# EAGLE board (Eagle)DriveUnit_B-series(ver2.0) (EAGLE 9.6.2)
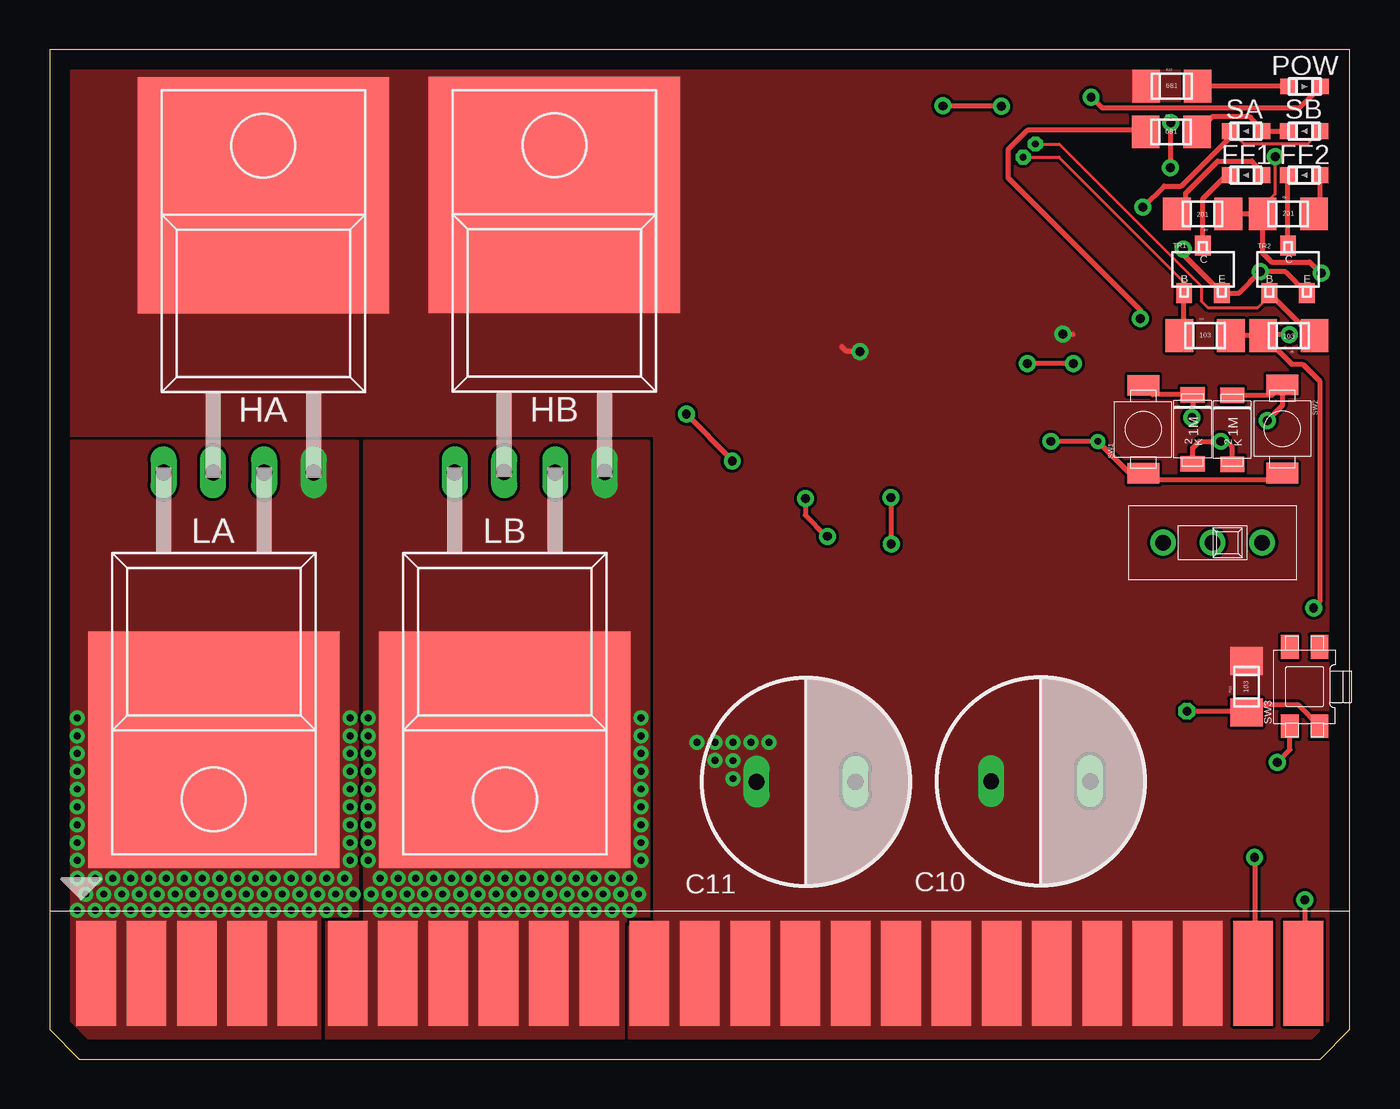
[diagram p0: board, top side]
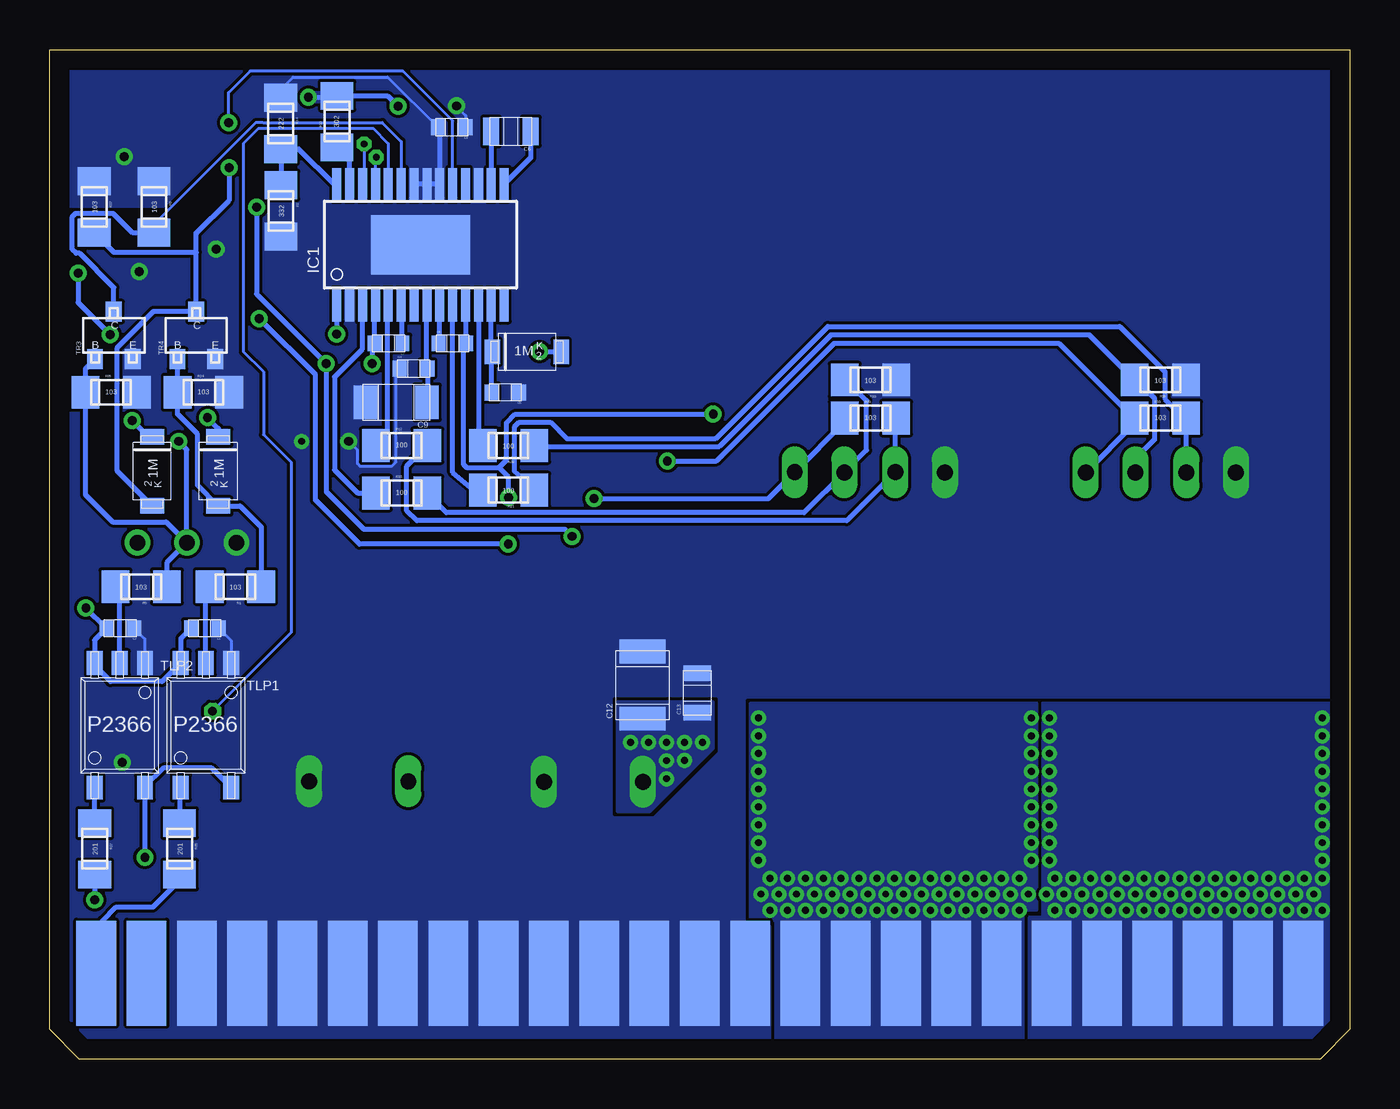
[diagram p1: board, bottom side, seen from below]

Size 65.68 x 51 mm. Coordinates in mm from the lower left corner, seen from the top.
Outline: 0,51 0,1.5 1.5,0 64.18,0 65.68,1.5 65.68,51 0,51
Copper layers (1*16): Top 0.035mm / dielectric 1.5mm / Bottom 0.035mm
Design rules "default": minimum track width 6mil, minimum drill 0.35mm, track to track 6mil, track to pad 6mil, pad to pad 6mil, via to via 6mil, smd to smd 6mil, copper to edge 40mil, drill to drill 6mil, minimum pad ring 10mil, minimum via ring 8mil, stop-mask expansion 4mil, vias tented up to drill 0mil, thermal gap 10mil

## Footprints (pad centres in the part's own frame; a part is rotated, then mirrored left to right if it is on the bottom)
GCM188L81H104KA57 = smd 0.7 x 0.8: P$1 -0.7,0; P$2 0.7,0
GCM21BR71H474KA55 = smd 0.8 x 1.4: P$1 -1,0; P$2 1,0
GRT31CC81H225KE01L = smd 1.2 x 1.7: P$1 -1.55,0; P$2 1.55,0
35PZJ330M10X9 = drill 0.8 long: A 0,2.5; C 0,-2.5
GRM32ER7YA106KA12 = smd 1.2 x 2.3: P$1 -1.7,0; P$2 1.7,0
GRM21BC72A105KE01 = smd 0.8 x 1.4: P$1 -1,0; P$2 1,0
GS1010FL = smd 0.78 x 1.22: A 3.48,0; C 0,0
10046971-019LF = smd 2 x 5.3: P$1 -30.48,0; P$2 -27.94,0; P$3 -25.4,0; P$4 -22.86,0; P$5 -20.32,0; P$6 -17.78,0; P$7 -15.24,0; P$8 -12.7,0; P$9 -10.16,0; P$10 -7.62,0; P$11 -5.08,0; P$12 -2.54,0; P$13 0,0; P$14 2.54,0; P$15 5.08,0; P$16 7.62,0; P$17 10.16,0; P$18 12.7,0; P$19 15.24,0; P$20 17.78,0; P$21 20.32,0; P$22 22.86,0; P$23 25.4,0; P$24 27.94,0; P$25 30.48,0 | smd 2 x 5.3 bottom: P$26 30.48,0; P$27 27.94,0; P$28 25.4,0; P$29 22.86,0; P$30 20.32,0; P$31 17.78,0; P$32 15.24,0; P$33 12.7,0; P$34 10.16,0; P$35 7.62,0; P$36 5.08,0; P$37 2.54,0; P$38 0,0; P$39 -2.54,0; P$40 -5.08,0; P$41 -7.62,0; P$42 -10.16,0; P$43 -12.7,0; P$44 -15.24,0; P$45 -17.78,0; P$46 -20.32,0; P$47 -22.86,0; P$48 -25.4,0; P$49 -27.94,0; P$50 -30.48,0
TO-220AB-NOHOLE = smd 12.7 x 11.938: DRAIN 0,8.915 | drill 0.8 long: GATE -2.54,-5.08; SOURCE 2.54,-5.08
A3921 = smd 0.45 x 1.65: 1 0,-0.9; 2 0.65,-0.9; 3 1.3,-0.9; 4 1.95,-0.9; 5 2.6,-0.9; 6 3.25,-0.9; 7 3.9,-0.9; 8 4.55,-0.9; 9 5.2,-0.9; 10 5.85,-0.9; 11 6.5,-0.9; 12 7.15,-0.9; 13 7.8,-0.9; 14 8.45,-0.9; 15 8.45,5.2; 16 7.8,5.2; 17 7.15,5.2; 18 6.5,5.2; 19 5.85,5.2; 20 5.2,5.2; 21 4.55,5.2; 22 3.9,5.2; 23 3.25,5.2; 24 2.6,5.2; 25 1.95,5.2; 26 1.3,5.2; 27 0.65,5.2; 28 0,5.2 | smd 5 x 3: PAD 4.225,2.15
SML-E12V8WT86 = smd 0.8 x 0.8: A 0,1.65; K 0,0
RG2012 = smd 1.4 x 1.65: LEFT 0,0; RIGHT 2.6,0
TVAF06-A020B-R = smd 1.05 x 1.6: LEFT 0,0; RIGHT 4.45,0
THAF01-NC-R = smd 1.2 x 0.9: 1 0,1.5; 2 4,1.5; 3 0,0; 4 4,0
SS-12D00G3 = drill 0.8: C 0,0; L -2.5,0; R 2.5,0
TLP2366 = smd 0.8 x 1.2: 1 0,0; 3 2.54,0; 4 2.54,6.3; 5 1.27,6.3; 6 0,6.3
2SC3325 = smd 1 x 0.8: B 0,1.9; C 2.4,0.95; E 0,0

## Placement (x,y rotation side)
C1  GCM188L81H104KA57  [GCM188L81H104KA57]  57.84,21.77 180 bottom
C2  GCM188L81H104KA57  [GCM188L81H104KA57]  62.1,21.77 180 bottom
C3  GCM188L81H104KA57  [GCM188L81H104KA57]  45.36,47.07 180 bottom
C4  GCM188L81H104KA57  [GCM188L81H104KA57]  47.29,34.89 0 bottom
C5  GCM188L81H104KA57  [GCM188L81H104KA57]  42.66,33.68 180 bottom
C6  GCM21BR71H474KA55  [GCM21BR71H474KA55]  42.38,46.86 180 bottom
C7  GCM188L81H104KA57  [GCM188L81H104KA57]  48.56,36.16 180 bottom
C8  GCM188L81H104KA57  [GCM188L81H104KA57]  45.33,36.16 0 bottom
C9  GRT31CC81H225KE01L  [GRT31CC81H225KE01L]  48.17,33.18 180 bottom
C10  35PZJ330M10X9  [35PZJ330M10X9]  50.06,14.04 90 top
C11  35PZJ330M10X9  [35PZJ330M10X9]  38.21,14.01 90 top
C12  GRM32ER7YA106KA12  [GRM32ER7YA106KA12]  35.73,18.9 90 bottom
C13  GRM21BC72A105KE01  [GRM21BC72A105KE01]  32.97,18.5 90 bottom
D1  GS1010FL  [GS1010FL]  43.32,35.73 0 bottom
D2  GS1010FL  [GS1010FL]  57.16,31.43 270 bottom
D3  GS1010FL  [GS1010FL]  60.5,31.43 270 bottom
D4  GS1010FL  [GS1010FL]  57.73,33.56 270 top
D5  GS1010FL  [GS1010FL]  59.73,33.54 270 top
EDGE1  10046971-019LF  [10046971-019LF]  32.84,4.35 0 top
HA  IRLB3813NOHOLE  [TO-220AB-NOHOLE]  10.8,34.72 0 top
HB  IRLB3813NOHOLE  [TO-220AB-NOHOLE]  25.5,34.73 0 top
IC1  A3921  [A3921]  51.17,38.99 0 bottom
LA  IRLB3813NOHOLE  [TO-220AB-NOHOLE]  8.3,24.56 180 top
LB  IRLB3813NOHOLE  [TO-220AB-NOHOLE]  23,24.56 180 top
LED1  SML-E12V8WT86  [SML-E12V8WT86]  59.6,46.87 270 top
LED2  SML-E12V8WT86  [SML-E12V8WT86]  62.54,46.87 270 top
LED3  SML-E12V8WT86  [SML-E12V8WT86]  64.22,49.13 90 top
LED4  SML-E12V8WT86  [SML-E12V8WT86]  59.6,44.65 270 top
LED5  SML-E12V8WT86  [SML-E12V8WT86]  62.54,44.65 270 top
R1  RG2012  [RG2012]  54.99,23.87 180 bottom
R2  RG2012N-332-W-T1  [RG2012]  53.99,44.15 270 bottom
R3  RG2012P-681-B-T5  [RG2012]  55.35,46.84 0 top
R4  RG2012  [RG2012]  57.06,36.55 0 top
R5  RG2012  [RG2012]  63.89,36.55 180 top
R6  RG2012  [RG2012]  60.41,44.35 270 bottom
R7  RG2012N-201-W-T1  [RG2012]  59.54,42.7 180 top
R8  RG2012N-201-W-T1  [RG2012]  61.26,42.7 0 top
R9  RG2012  [RG2012]  59.75,23.87 180 bottom
R10  RG2012Q-100-D-T5  [RG2012]  49.2,28.6 0 bottom
R11  RG2012  [RG2012]  60.45,17.52 90 top
R12  RG2012Q-100-D-T5  [RG2012]  49.2,31 0 bottom
R13  RG2012P-302-B-T5  [RG2012]  51.16,46.06 90 bottom
R14  RG2012N-222-W-T1  [RG2012]  54.01,48.57 270 bottom
R15  RG2012  [RG2012]  8.28,34.31 180 bottom
R16  RG2012  [RG2012]  10.88,32.38 0 bottom
R17  RG2012  [RG2012]  63.42,44.35 270 bottom
R18  RG2012  [RG2012]  22.92,34.31 180 bottom
R19  RG2012  [RG2012]  25.52,32.38 0 bottom
R20  RG2012Q-100-D-T5  [RG2012]  41.2,31 180 bottom
R21  RG2012Q-100-D-T5  [RG2012]  41.2,28.75 180 bottom
R22  RG2012P-681-B-T5  [RG2012]  55.38,49.15 0 top
R24  RG2012  [RG2012]  59.21,33.68 0 bottom
R25  RG2012  [RG2012]  63.87,33.68 0 bottom
R26  RG2012N-201-W-T1  [RG2012]  59.11,11.93 270 bottom
R27  RG2012N-201-W-T1  [RG2012]  63.4,11.93 270 bottom
SW1  TVAF06-A020B-R  [TVAF06-A020B-R]  55.24,29.59 90 top
SW2  TVAF06-A020B-R  [TVAF06-A020B-R]  62.26,34.06 270 top
SW3  THAF01-NC-R  [THAF01-NC-R]  64.14,16.82 90 top
SW4  SS-12D00G3  [SS-12D00G3]  58.74,26.09 180 top
TLP1  TLP2366  [TLP2366]  59.05,13.72 0 bottom
TLP2  TLP2366  [TLP2366]  63.4,13.72 0 bottom
TR1  2SC3325  [2SC3325]  59.2,38.7 90 top
TR2  2SC3325  [2SC3325]  63.5,38.7 90 top
TR3  2SC3325  [2SC3325]  61.48,35.36 90 bottom
TR4  2SC3325  [2SC3325]  57.32,35.36 90 bottom

## Library data of the parts
C1-C5 C7 C8 = GCM188L81H104K57(0.1uF)
C6 = GCM21BR71H474KA55(0.47uF)
C9 = GRT31CC81H225KE01L
C10 C11 = 35PZJ330M10X9
C12 = GRM32ER7YA106KA12(10uF)
C13 = GRM21BC72A105KE01(1uF)
D1-D5 = GS1010FL
EDGE1 = 10046971-019LF
HA HB LA LB = OKUDA_libraries
IC1 = A3921
LED1-LED5 = SML-E12V8WT86
R1 R4-R6 R9 R11 R15-R19 R24 R25 = RG2012
R2 = RG2012N-332-W-T1
R3 R22 = RG2012P-681-B-T5
R7 R8 R26 R27 = RG2012N-201-W-T1
R10 R12 R20 R21 = RG2012Q-100-D-T5
R13 = RG2012P-302-B-T5
R14 = RG2012N-222-W-T1
SW1 SW2 = TVAF06-A020B-R
SW3 = THAF01-NC-R
SW4 = SS-12D00G3
TLP1 TLP2 = TLP2366
TR1-TR4 = 2SC3325

## Nets
DIR: D3.A IC1.19 R17.RIGHT TR4.C
DIR_IN: EDGE1.P$26 R26.RIGHT
FF1: IC1.25 R4.LEFT TR1.B
FF2: IC1.26 R5.LEFT TR2.B
GHA: IC1.10 R21.RIGHT
GHB: IC1.5 R12.LEFT
GLA: IC1.12 R20.RIGHT
GLB: IC1.3 R10.LEFT
GND: C1.P$1 C2.P$1 C3.P$1 C4.P$1 C5.P$1 C9.P$2 C10.C C11.C C12.P$2 C13.P$2 EDGE1.P$28 EDGE1.P$29 EDGE1.P$30 EDGE1.P$31 EDGE1.P$32 EDGE1.P$33 EDGE1.P$34 EDGE1.P$35 EDGE1.P$36 EDGE1.P$37 EDGE1.P$38 EDGE1.P$39 IC1.2 IC1.17 IC1.PAD LA.SOURCE LB.SOURCE LED3.K R2.RIGHT R13.RIGHT R15.LEFT R18.LEFT R24.RIGHT R25.RIGHT SW1.LEFT SW2.RIGHT SW3.1 SW4.R TLP1.4 TLP2.4 TR1.E TR2.E TR3.E TR4.E
GND_IN: EDGE1.P$24 TLP1.3 TLP2.3
LAP: D4.A D5.A R9.LEFT R25.LEFT SW4.C TR3.B
N$1: C6.P$1 IC1.15
N$2: C6.P$2 IC1.16
N$3: C7.P$1 IC1.6
N$4: IC1.28 R2.LEFT R14.RIGHT
N$5: LED4.K TR1.C
N$6: C4.P$2 C9.P$1 IC1.8
N$7: C5.P$2 D1.C IC1.13
N$8: LED5.K TR2.C
N$9: LED4.A R7.RIGHT
N$10: LED5.A R8.RIGHT
N$11: R1.RIGHT TLP1.5
N$12: D2.C D4.C SW1.RIGHT
N$13: HA.GATE R16.RIGHT R21.LEFT
N$14: R9.RIGHT TLP2.5
N$15: C8.P$1 IC1.9
N$16: D2.A R1.LEFT R24.LEFT TR4.B
N$18: LED1.A LED2.K R3.RIGHT
N$19: IC1.27 R13.LEFT
N$20: D3.C D5.C SW2.LEFT
N$21: HB.GATE R12.RIGHT R19.RIGHT
N$22: LED3.A R22.RIGHT
N$23: R26.LEFT TLP1.1
N$24: R27.LEFT TLP2.1
N$25: LA.GATE R15.RIGHT R20.LEFT
N$26: LB.GATE R10.RIGHT R18.RIGHT
PWM: IC1.23 R6.RIGHT TR3.C
PWM_IN: EDGE1.P$25 R27.RIGHT
RESET: IC1.24 R11.LEFT SW3.3
SA: C8.P$2 EDGE1.P$1 EDGE1.P$2 EDGE1.P$3 EDGE1.P$4 EDGE1.P$5 EDGE1.P$45 EDGE1.P$46 EDGE1.P$47 EDGE1.P$48 EDGE1.P$49 EDGE1.P$50 HA.SOURCE IC1.11 LA.DRAIN R3.LEFT R16.LEFT
SB: C7.P$2 EDGE1.P$6 EDGE1.P$7 EDGE1.P$8 EDGE1.P$9 EDGE1.P$10 EDGE1.P$11 EDGE1.P$40 EDGE1.P$41 EDGE1.P$42 EDGE1.P$43 EDGE1.P$44 HB.SOURCE IC1.4 LB.DRAIN LED1.K LED2.A R19.LEFT
V5: C1.P$2 C2.P$2 C3.P$2 IC1.20 IC1.21 IC1.22 R4.RIGHT R5.RIGHT R6.LEFT R7.LEFT R8.LEFT R14.LEFT R17.LEFT TLP1.6 TLP2.6
VCC: C10.A C11.A C12.P$1 C13.P$1 D1.A EDGE1.P$12 EDGE1.P$13 EDGE1.P$14 EDGE1.P$15 EDGE1.P$16 EDGE1.P$17 EDGE1.P$18 EDGE1.P$19 EDGE1.P$20 EDGE1.P$21 EDGE1.P$22 EDGE1.P$23 HA.DRAIN HB.DRAIN IC1.1 R11.RIGHT R22.LEFT
VCC_IN: EDGE1.P$27

## Tracks (layer width: path | path; a pad name or v marks a point on that pad's centre or on a via)
DIR  (via drill 0.45)
  Top 0.152: v56.64,47.31 56.61,47.28
  Top 0.254: 56.61,47.28 v56.61,45.02
  Bottom 0.152: IC1.19 45.32,47.4 47.83,49.91 55.55,49.91 56.64,48.82 v56.64,47.31
  Bottom 0.254: v56.61,45.02 v56.62,45.02 56.62,43.38 58.29,41.7 58.27,41.68 58.27,40.76 | 58.27,40.76 TR4.C 58.29,37.78 60.42,37.78 62.25,35.95 62.25,29.7 D3.A | R17.RIGHT 62.43,40.76 58.27,40.76
DIR_IN
  Bottom 0.152: 63.32,6.56 EDGE1.P$26 63,4.67
  Bottom 0.254: 63,4.67 63,7 62.31,7.69 60.45,7.69 59.11,9.03 R26.RIGHT
FF1  (via drill 0.35)
  Top 0.152: v49.17,45.57 50.98,45.57 57.3,39.25 TR1.B
  Top 0.254: R4.LEFT 57.3,36.79 TR1.B
  Bottom 0.152: IC1.25 49.22,45.52 v49.17,45.57
FF2  (via drill 0.35)
  Top 0.152: v49.79,46.23 51,46.23 58.17,39.06 58.17,38.3 58.5,37.97 61.02,37.97 61.74,38.7 TR2.B
  Top 0.254: TR2.B 63.75,36.55 R5.LEFT
  Bottom 0.152: IC1.26 49.78,44.28 v49.78,46.22 v49.79,46.23
GHA
  Bottom 0.254: R21.RIGHT 44.27,28.75 45.32,29.64 IC1.10
GHB
  Bottom 0.152: 48.62,38.04 IC1.5 48.62,38.04 | R12.LEFT 49.2,31.03 48.62,31.6
  Bottom 0.254: 48.62,38.04 48.62,31.6
GLA
  Bottom 0.152: 44,30.84 R20.RIGHT
  Bottom 0.254: IC1.12 44,38.07 44,30.84
GLB
  Bottom 0.254: IC1.3 49.9,38.06 49.9,35.85 51.29,34.46 51.29,29.77 50.12,28.6 R10.LEFT
GND  (via drill 0.35, 0.45)
  Top 0.152: 45.15,48.13 v45.13,48.15
  Top 0.254: SW3.1 62.64,15.64 v62,15 | LED3.K 63.13,48.04 53.16,48.04 v52.6,48.6 | v48.08,48.13 45.15,48.13 | v50.57,31.21 v52.95,31.21 54.57,29.59 SW1.LEFT 55.48,29.59 55.79,29.28 61.93,29.28 SW2.RIGHT | v57.26,40.92 57.26,40.64 TR1.E 60.08,38.7 v61.15,39.77 | v61.15,39.77 v61.15,39.78 | v61.15,39.77 62.43,39.77 TR2.E
  Bottom 0.152: C1.P$1 56.51,21.14 TLP1.4 | C2.P$1 60.86,21.23 TLP2.4 | 51.94,48.6 51.88,48.66 R13.RIGHT | v45.13,48.15 45.13,48.13 44.66,47.66 C3.P$1 | C4.P$1 48.21,34.67 48.21,30.14 48.41,29.95 49.99,29.95 50.13,30.08 50.13,30.77 v50.56,31.21 v50.57,31.21 | v52.95,31.21 52.7,31.21
  Bottom 0.254: v52.6,48.6 51.94,48.6 | R13.RIGHT 48.61,48.66 v48.08,48.13 | TR3.E 61.41,35.43
  pour Bottom (rank 2, no thermals): -7.3,55 -7.3,-2 69,-2 69,55
GND_IN  (via drill 0.45)
  Top 0.152: 60.86,4.43 EDGE1.P$24
  Top 0.254: v60.86,10.19 60.86,4.43
  Bottom 0.152: 60.86,13.77 TLP2.3
  Bottom 0.254: TLP1.3 57.5,14.71 59.92,14.71 60.86,13.77 | TLP2.3 v60.86,10.19
LAP  (via drill 0.45)
  Top 0.254: 59.71,30.08 D5.A 59.73,30.91 59.43,31.21 v59.16,31.21 58.07,31.21 57.73,30.87 D4.A 57.73,30.24
  Bottom 0.254: SW4.C 59.75,25.08 R9.LEFT | TR3.B 63.87,34.87 R25.LEFT 63.87,28.51 62.5,27.14 59.79,27.14 SW4.C | SW4.C 58.74,30.79 v59.16,31.21
N$1
  Bottom 0.254: C6.P$1 41.38,45.53 IC1.15
N$2
  Bottom 0.152: IC1.16
  Bottom 0.254: C6.P$2 IC1.16
N$3
  Bottom 0.152: 47.86,38.03 IC1.6
  Bottom 0.254: C7.P$1 47.86,38.03
N$4
  Bottom 0.152: IC1.28 51.31,44.19 | 53.99,45.95 R14.RIGHT
  Bottom 0.254: 51.31,44.19 53.09,45.97 R14.RIGHT | 53.99,45.95 R2.LEFT
N$5
  Top 0.152: 59.56,44.52 59.63,44.59 LED4.K
  Top 0.254: TR1.C 58.25,43.46 59.38,44.59 59.63,44.59
N$6
  Bottom 0.152: C9.P$1 46.65,33.21
  Bottom 0.254: C9.P$1 46.59,33.21 C4.P$2 46.67,34.97 46.67,38.04 IC1.8
N$7
  Bottom 0.152: 43.37,35.78 D1.C 43.36,35.69
  Bottom 0.254: 43.37,35.78 IC1.13 | C5.P$2 43.36,35.69
N$8
  Top 0.254: TR2.C LED5.K
N$9
  Top 0.152: R7.RIGHT 57,42.77 57,43.43 | 61.34,44.82 61.34,44.75 LED4.A
  Top 0.254: R7.RIGHT 57.38,43.14 57.38,43.75 58.99,45.36 60.73,45.36 61.34,44.75
N$10
  Top 0.254: R8.RIGHT 64.19,43.03 LED5.A
N$11
  Bottom 0.254: R1.RIGHT 57.81,23.65 57.81,20.05 TLP1.5
N$12  (via drill 0.45)
  Top 0.254: SW1.RIGHT 55.72,33.56 57.6,33.56 D4.C 57.74,32.45 v57.7,32.41
  Bottom 0.254: D2.C 57.16,31.86 v57.7,32.41
N$13
  Bottom 0.152: 8.37,32.38 R16.RIGHT 8.26,32.36
  Bottom 0.254: R21.LEFT 41.83,29.38 42.18,29.68 42.18,31.96 41.97,32.17 40.38,32.17 39.57,31.36 32.03,31.36 26.38,37.02 11.63,37.02 9.34,34.72 9.34,33.35 8.37,32.38 | HA.GATE 8.26,32.36
N$14
  Bottom 0.152: 62.13,23.64 R9.RIGHT
  Bottom 0.254: TLP2.5 62.13,23.64
N$15
  Bottom 0.152: C8.P$1 45.97,36.22
  Bottom 0.254: 45.97,36.22 IC1.9
N$16
  Bottom 0.254: R1.LEFT 54.99,26.88 56.06,27.95 D2.A 58.2,28.99 58.2,31.57 59.21,32.58 R24.LEFT TR4.B
N$18
  Top 0.152: 61.34,46.9 LED1.A
  Top 0.254: LED2.K LED1.A 60.59,47.62 58.75,47.62 57.97,46.84 R3.RIGHT
N$19
  Bottom 0.152: IC1.27
  Bottom 0.254: IC1.27 50.52,45.42 R13.LEFT
N$20  (via drill 0.45)
  Top 0.152: SW2.LEFT 62.26,34.43
  Top 0.254: SW2.LEFT 62.31,34.01 | SW2.LEFT 62.1,33.9 | SW2.LEFT 62.26,33.01 v61.5,32.25 | D5.C 61.74,33.54 SW2.LEFT
  Bottom 0.254: v61.5,32.25 | 60.85,31.43 D3.C 60.68,31.43 v61.5,32.25
N$21
  Bottom 0.152: 22.96,32.34 R19.RIGHT
  Bottom 0.254: R12.RIGHT 47.64,29.96 47.64,27.7 47.14,27.2 25.41,27.2 HB.GATE 22.96,32.34
N$22
  Top 0.152: LED3.A 62.55,49.15
  Top 0.254: 62.55,49.15 R22.RIGHT
N$23
  Bottom 0.152: TLP1.1 59.11,13.66
  Bottom 0.254: 59.11,13.66 R26.LEFT
N$24
  Bottom 0.254: R27.LEFT TLP2.1
N$25
  Bottom 0.254: R20.LEFT 41.15,30.95 31.85,30.95 26.22,36.58 13.15,36.58 R15.RIGHT 10.8,34.31 9.88,33.39 9.88,31.29 10.84,30.33 LA.GATE
N$26
  Bottom 0.152: 25.31,34.31 R18.RIGHT
  Bottom 0.254: R10.RIGHT 46.6,28.58 45.63,27.61 27.57,27.61 LB.GATE 24.41,30.77 24.41,33.28 25,33.87 25,34 25.31,34.31
PWM
  Bottom 0.152: IC1.23 47.92,46.35 48.88,47.31 54.9,47.31 54.91,47.3 55.27,47.3 60.41,42.16 R6.RIGHT
  Bottom 0.254: TR3.C 62.43,38.98 64.16,40.71 64.34,40.71 64.53,40.9 64.53,42.56 64.36,42.73 62.48,42.73 61.5,41.75 R6.RIGHT
PWM_IN  (via drill 0.45)
  Top 0.152: 63.39,4.42 EDGE1.P$25
  Top 0.254: v63.39,8.05 63.39,4.42
  Bottom 0.152: R27.RIGHT
  Bottom 0.254: R27.RIGHT v63.39,8.05
RESET  (via drill 0.45)
  Top 0.152: 60.39,17.58 R11.LEFT 60.45,17.57
  Top 0.254: v57.45,17.58 60.39,17.58 | 60.45,17.57 60.8,17.92 63.04,17.92 SW3.3
  Bottom 0.152: IC1.24 48.57,46.24 49.32,47 55.14,47 55.89,46.25 55.89,35.74 54.87,34.72 54.87,31.55 53.46,30.14 53.46,21.57 v57.45,17.58
SA  (via drill 0.35, 0.45)
  Top 0.152: v42.5,26.03 v42.51,26.02
  Top 0.254: v34.48,30.22 34.48,30.26 v32.16,32.58 | v42.5,28.37 v42.5,26.03 | v55.09,37.41 55.09,37.84 48.43,44.51 48.43,45.96 49.38,46.92 55.27,46.92 R3.LEFT
  Bottom 0.152: 44.63,38.05 IC1.11 | C8.P$2 | v32.16,32.58 | 42.95,29.89 42.96,29.9 42.98,29.89 | v55.09,37.41 | 10.88,32.1 R16.LEFT
  Bottom 0.254: C8.P$2 44.63,38.05 | v32.16,32.58 42.16,32.58 42.6,32.14 42.6,30.26 42.96,29.9 | C8.P$2 44.78,36.01 44.78,30.04 44.62,29.89 42.98,29.89 42.57,29.48 42.5,29.4 v42.5,28.37 | v34.48,30.22 32,30.22 26.05,36.17 14.71,36.17 10.92,32.38 R16.LEFT | v42.51,26.02 50.02,26.02 52.24,28.24 52.24,34.57 v55.09,37.41 | HA.SOURCE 10.88,32.1
  other vias: 14.9,9.14 14,9.14 13.1,9.14 12.2,9.14 11.3,9.14 10.4,9.14 9.5,9.14 8.6,9.14 7.7,9.14 6.8,9.14 5.9,9.14 1.4,14.54 5,9.14 4.1,9.14 1.4,13.64 1.4,12.74 3.2,9.14 2.3,9.14 1.4,11.84 1.4,10.94 1.4,9.14 1.4,10.04 1.4,7.53 2.3,7.53 3.2,7.53 4.1,7.53 5,7.53 5.9,7.53 6.8,7.53 7.7,7.53 8.6,7.53 9.5,7.53 10.4,7.53 11.3,7.53 12.2,7.53 13.1,7.53 14,7.53 14.9,7.53 1.84,8.34 2.74,8.34 3.64,8.34 4.54,8.34 5.44,8.34 6.34,8.34 7.24,8.34 8.14,8.34 9.04,8.34 9.94,8.34 10.84,8.34 11.74,8.34 12.64,8.34 13.54,8.34 14.44,8.34 15.34,8.34 15.18,10.04 15.18,10.94 15.18,11.84 15.18,12.74 15.18,13.64 15.18,14.54 1.4,15.44 1.4,16.34 1.4,17.24 15.18,15.44 15.18,17.24 15.18,16.34
  pour Top (no thermals): 15.57,31.2 -1,31.2 -1,-3 13.66,-3 13.66,7.22 15.57,7.22
  pour Bottom (no thermals): 15.52,18 -1.8,18 -1.8,-4.5 16.2,-4.5 16.2,7.2 15.52,7.2
SB  (via drill 0.35, 0.45)
  Top 0.152: LED1.K 60.32,46.24 63.56,46.24 LED2.A | v55.22,43.03 55.22,43.09
  Top 0.254: v51.7,35.13 v51.69,35.14 v49.39,35.14 | v39.29,26.41 39.24,26.41 38.17,27.48 v38.17,28.32 | v55.22,43.03 56.3,44.1 57.15,44.1 59.6,46.55 LED1.K
  Bottom 0.152: 49.26,38.05 IC1.4 | C7.P$2 49.39,36.03 | 25.52,32.17 R19.LEFT
  Bottom 0.254: C7.P$2 49.26,38.05 | 49.39,36.03 v49.39,35.14 | v39.29,26.41 39.65,26.77 49.81,26.77 51.7,28.66 v51.7,35.13 55.22,38.65 v55.22,43.03 | v38.17,28.32 29.37,28.32 HB.SOURCE 25.52,32.17
  other vias: 16.7,9.14 16.25,8.34 18.5,9.14 17.6,9.14 19.4,9.14 20.3,9.14 21.2,9.14 22.1,9.14 18.05,8.34 17.15,8.34 18.95,8.34 19.85,8.34 20.75,8.34 21.65,8.34 22.55,8.34 23,9.14 23.9,9.14 23.45,8.34 24.35,8.34 24.8,9.14 26.6,9.14 25.7,9.14 25.25,8.34 26.15,8.34 27.05,8.34 27.5,9.14 28.4,9.14 27.95,8.34 28.85,8.34 29.3,9.14 29.75,8.34 16.09,10.04 16.09,10.94 16.09,11.84 16.09,12.74 16.09,13.64 16.09,14.54 29.88,10.04 29.88,10.94 29.88,11.84 29.88,12.74 29.88,13.64 29.88,14.54 16.7,7.53 17.6,7.53 18.5,7.53 19.4,7.53 20.3,7.53 22.1,7.53 21.2,7.53 23,7.53 23.9,7.53 24.8,7.53 25.7,7.53 26.6,7.53 28.4,7.53 27.5,7.53 29.3,7.53 29.88,15.44 29.88,16.34 29.88,17.24 16.09,16.34 16.09,17.24 16.09,15.44
  pour Top (no thermals): 15.89,31.2 15.89,6.91 13.97,6.91 13.97,-3 29,-3 29,7 30.27,7 30.27,31.2
  pour Bottom (no thermals): 15.83,18 15.83,7.51 16.51,7.51 16.51,-4.5 29,-4.5 29,7 30.27,7 30.27,18
V5  (via drill 0.45)
  Top 0.152: 61.2,42.71 61,42.71 61.11,42.71 61.2,42.71 | 61.2,42.71 61.36,42.71 | 61.2,42.71 R8.LEFT 61.26,43.07 61.88,43.69 61.88,45.56 v61.9,45.58 | 61.37,36.47 R5.RIGHT | 59.56,42.7 R7.LEFT
  Top 0.254: R5.RIGHT R4.RIGHT | 61.29,36.5 R5.RIGHT | R5.RIGHT 61.27,36.55 | R7.LEFT 61.19,42.7 61.2,42.71 | R5.RIGHT 62.74,35.1 63.29,35.1 64.15,34.24 64.15,23.11 v63.84,22.8 | R8.LEFT 61.26,40.73 61.72,40.27 63.64,40.27 64.21,39.7 v64.23,39.7 | v62.61,36.6 61.34,36.6 R5.RIGHT
  Bottom 0.152: 45.97,46.9 C3.P$2 48.61,49.6 53.38,49.6 54.01,48.97 R14.LEFT | 63.4,19.88 TLP2.6 | v61.9,45.58 61.78,45.58
  Bottom 0.254: C1.P$2 59.05,21.26 TLP1.6 59.99,19.08 62.6,19.08 63.4,19.88 | TLP2.6 63.4,21.17 C2.P$2 v63.84,22.8 | 45.97,46.9 IC1.20 IC1.21 IC1.22 | v64.23,39.7 64.23,38.22 v62.61,36.6
  pour Bottom (no thermals): 48,50.12 45.31,47.43 45.31,43.43 51.37,43.43 51.37,44.25 54.28,47.16 55.74,47.16 59.85,43.05 65.13,43.05 66.53,44.45 66.56,44.45 66.56,51.44 66,52 48,52
VCC  (via drill 0.35, 0.45)
  Top 0.254: v51.17,36.62 51.67,36.62 51.69,36.6 | v40.94,35.75 40.25,35.75 40,36
  Bottom 0.254: IC1.1 v51.17,36.62 | D1.A 39.86,35.75 v40.94,35.75
  other vias: 32.7,16 33.61,16 33.61,15.09 34.52,15.08 34.52,14.17 34.52,16 35.43,16 36.34,16
  pour Top (rank 2, no thermals): -6,55 -6,-2 69,-2 69,55
  pour Bottom (no thermals): 32.19,18 36.97,18 36.97,12.56 35.37,12.56 32.19,15.74

## Text on the board
tPlace: POW | SA | SB | FF1 | FF2